# Altium PCB PCB1.PcbDoc (part 2 of 2)
Units mil, origin at the board's own origin, x right, y up, seen from the top; angles counter-clockwise.
Board outline 2700 x 1000 mil, 4 copper layers (LaYeR_1, LaYeR_2, LaYeR_3, LaYeR_4), stack 61.583 mil thick; 55 components, 67 nets, 281 pads, 143 vias.
Unrouted connection lines stored in the file: 1.
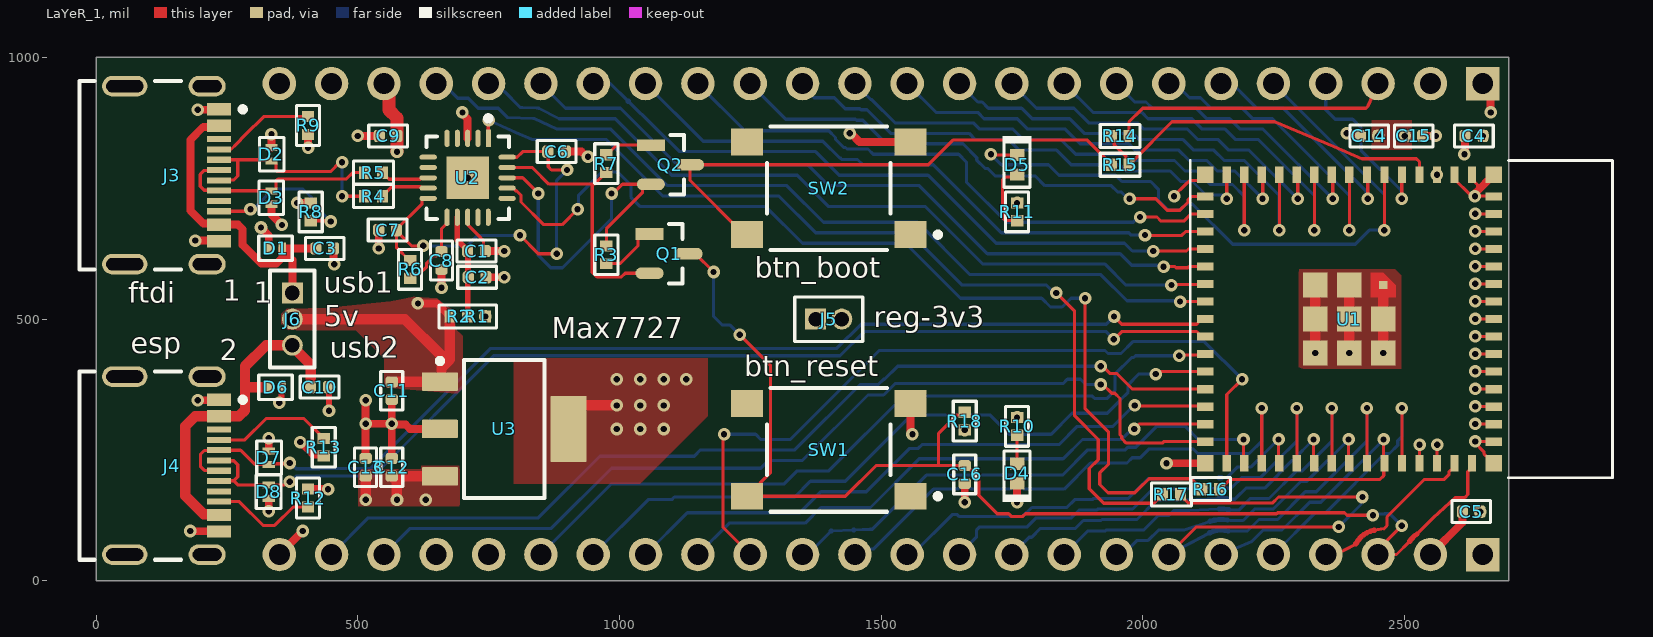
[diagram p0: LaYeR_1 view]

## Via types
v1: diameter 24, hole 12, LaYeR_1 to LaYeR_4, tented both sides, 143 vias

## Nets (pads, with @x,y where several pads share a name; then routed paths per layer and width w, separated by ;. In a path a pad name is that pad's centre, name@x,y a point inside that pad or via, vN(x,y) a via of type N, cw(c..) or ccw(c..) an arc to the next point about the centre after c; other vN are vias at no path point) (continued)
btn_gpio0: Q2.3 R15.1 SW2.2 | length 1026
  LaYeR_1 w6: SW2.2 1238.58,661.42 1135,765 Q2.3 1590.23,795 1637.23,842 1894.18,842 1940,796.18 R15.1
chip_pu: C16.2 J2.3 Q1.3 R18.1 SW1.2 U1.45 | length 2397.3
  LaYeR_1 w6: Q1.3 1145,625 v1(1180,590) ; v1(1230,470) 1289.02,410.98 1289.02,206.93 1269.02,186.93 1269.02,182.01 SW1.2@1248.43,161.42 ; SW1.2 SW1.2@1248.43,161.42 ; R18.1 1654.37,316.38 1644.73,316.38 1610,281.65 1610,220 ; v1(2440,125) 2390.62,125 2385.76,129.86 2257.87,129.86 2256.01,128 1776.18,128 1771.18,123 1748.82,123 1743.82,128 1722,128 1686.81,163.19 1686.81,199.68 1674.72,211.77 1669.75,211.77 1661.52,220 1610,220 ; v1(2495,105) 2450,60 J2.3 2485,50 2510.55,75.55 ; 2524.45,89.45 2555.39,120.39 2597.51,158.83 2615.34,158.83 2621.2,164.69 2621.2,208.44 2629.29,216.54 U1.45 ; SW1.2@1248.43,161.42 1431.84,161.42 1490.42,220 1610,220
  LaYeR_1 w10: 2510.55,75.55 cw(c2550,50) 2524.45,89.45
  LaYeR_4 w6: v1(1180,590) 1180,505 1196.16,488.84 1210.66,488.84 1229.5,470 v1(1230,470) ; v1(2440,125) 2442.68,127.68 2461.68,127.68 2462,128 2472,128 v1(2495,105)
con1_usb_n: D2.2 J3.A7 J3.B7 R4.1 | length 423.4
  LaYeR_1 w6.23: J3.A7 235.51,765.82 262.91,765.82 270.6,773.5 270.6,802.65 268.72,804.53 ; J3.B7@249.21,803.86 249.87,804.53 268.72,804.53 ; D2.2 339.92,802.2 343.7,798.43 343.7,785.64 347.35,781.99 447.83,781.99 465.84,800 v1(470,800) ; D2.2@335,804.53 268.72,804.53 ; v1(470,735) R4.1
  LaYeR_4 w6.23: v1(470,735) v1(470,800)
con1_usb_p: D3.2 J3.A6 J3.B6 R5.1 | length 402.9
  LaYeR_1 w6.23: J3.A6 234.18,784.18 206.77,784.18 199.09,776.5 199.09,753.82 206.77,746.14 234.18,746.14 J3.B6 235.08,745.24 334.76,745.24 D3.2 339.92,745 343.7,748.77 343.7,764.11 347.35,767.76 477.76,767.76 490,780 R5.1
con2_usb_n: D7.2 J4.A7 J4.B7 U1.23 | length 2133.9
  LaYeR_1 w6.12: J4.A7 234.12,210.88 206.8,210.88 199.14,218.53 199.14,241.16 206.8,248.81 234.12,248.81 J4.B7 276.09,249.53 303.41,222.2 D7.2 331.4,223.6 368.6,223.6 v1(370,225) ; v1(1945.33,505) 1960,490.33 2103.18,490.33 2106.76,493.91 2106.76,495.19 2111.57,500 U1.23
  LaYeR_4 w6.12: v1(370,225) 371.66,225 382.53,214.14 426.96,214.14 427,214.18 524.21,214.18 754.03,444 1415.75,444 1461.92,490.16 1930.33,490.16 1945.16,505 v1(1945.33,505)
con2_usb_p: D8.2 J4.A6 J4.B6 U1.24 | length 2099.2
  LaYeR_1 w6.12: J4.B6 235.56,191.19 262.89,191.19 ; J4.A6 235.56,229.12 262.89,229.12 270.54,221.47 270.54,198.84 262.89,191.19 ; v1(370,189.15) 365.16,189.15 358.81,182.8 D8.2 271.29,182.8 262.89,191.19 ; v1(1945,461.21) 1959.67,475.88 ; 1960,476.21 2103.18,476.21 2106.76,472.62 2106.76,471.35 2111.57,466.54 U1.24
  LaYeR_4 w6.12: v1(370,189.15) 371.66,189.15 382.53,200.02 432.8,200.02 432.85,200.06 530.06,200.06 759.88,429.88 1421.6,429.88 1467.77,476.04 1930.33,476.04 1945,461.37 v1(1945,461.21)
con_gpio0: J1.3 R14.1 | length 543.2
  LaYeR_1 w6: R14.1 1974.02,876.81 1997.28,900.07 2000.2,903 2426.73,903 2430.97,907.24 J1.3
dtr_ftdi: Q2.2 R3.1 U2.18 | length 646.1
  LaYeR_1 w6: U2.18 815,770 v1@840,745 ; R3.1 975,672.44 1043.86,741.3 1043.86,751.81 1049.64,757.6 Q2.2 ; v1(985,740) 987.99,740 1005.59,757.6 Q2.2@1044.7,757.6
  LaYeR_4 w6: v1(845,740) 845,621.82 868.82,598 891.18,598 985,691.82 v1(985,740)
ftdi_usb_n: R4.2 U2.9 | length 96.9
  LaYeR_1 w6.23: R4.2 547.01,736.18 554.52,743.7 555.7,743.7 565.05,753.04 619.21,753.04 621.93,750.32 U2.9
ftdi_usb_p: R5.2 U2.8 | length 94.7
  LaYeR_1 w6.23: R5.2 547.01,778.82 554.52,771.3 555.7,771.3 559.74,767.27 619.21,767.27 621.93,770 U2.8
GND: C1.1 C2.1 C3.1 C4.1 C5.1 C6.1 C7.1 C8.1 C9.1 C10.1 C11.1 C12.1 C13.1 C14.1 C15.1 C16.1 D1.1 D2.1 D3.1 D4.1 D6.1 D7.1 D8.1 J1.1 J1.23 J2.2 J2.24 J3.A1B12 J3.B1A12 J3.S1 J3.S2 J3.S3 J3.S4 J4.A1B12 J4.B1A12 J4.S1 J4.S2 J4.S3 J4.S4 R8.1 R9.1 R12.1 R13.1 SW1.3 SW2.3 U1.1 U1.2 U1.42 U1.43 U1.46 U1.47 U1.48 U1.49 U1.50 U1.51 U1.52 U1.53 U1.54 U1.55 U1.56 U1.57 U1.58 U1.59 U1.60 U1.61 U1.62 U1.63 U1.64 U1.65 U1.66 U1.67 U1.68 U1.69 U1.70 U1.71 U1.72 U1.73 U2.3 U2.13 U2.21 U3.2 U3.4 | length 3286.2
  LaYeR_1 w6: U2.13 710,680 730,660 740,650 C1.1@740,638.64 ; v1(2060,735) 2060,735.54 2082.09,757.63 2082.63,757.63 2089.84,764.84 2108.7,764.84 U1.63 ; U1.42@2529.27,224.78 v1(2529.27,259.67) ; U1.43@2562.74,224.78 v1(2562.74,259.67) ; U1.2 2595.83,767.72 2625.86,737.68 2632.32,737.68 v1(2635,735) 2669.88,735 U1.60 ; U1.1 2629.29,767.72 2640,757.01 2640,750 ; v1(2635.37,299.59) U1.47@2670.26,299.59 ; v1(2635.37,333.05) U1.48@2670.26,333.05 ; v1(2635.37,366.52) U1.49@2670.26,366.52 ; v1(2635.37,399.98) U1.50@2670.26,399.98 ; v1(2635.37,433.44) U1.51@2670.26,433.44 ; v1(2635.37,466.91) U1.52@2670.26,466.91 ; v1(2635.37,500.37) U1.53@2670.26,500.37 ; v1(2635.37,533.84) U1.54@2670.26,533.84 ; v1(2635.37,567.3) U1.55@2670.26,567.3 ; v1(2635.37,600.77) U1.56@2670.26,600.77 ; v1(2635.37,634.23) U1.57@2670.26,634.23 ; v1(2635.37,667.7) U1.58@2670.26,667.7 ; v1(2635.37,701.16) U1.59@2670.26,701.16 ; U1.46@2670.26,266.12 v1(2635.37,266.12) 2635.37,263.16 2652.17,246.37 2652.17,242.87 U1.65
  LaYeR_1 w11: v1(350,340) 350,343.52 354.2,347.72 354.2,368.61 D6.1 ; v1(445,325) C10.1@445,364.41
  LaYeR_1 w15: v1(180,95) 180.49,94.51 234.35,94.51 J4.B1A12 ; v1(189.39,650) J3.B1A12@215,650 ; v1(194.39,345) J4.A1B12@220,345 ; v1(194.39,900) J3.A1B12@220,900 ; v1(315,675) 330,660 D1.1 ; v1(330,132.8) D8.1 ; D7.1 v1(330,272.2) ; D3.1 335,700 v1(355,680) ; D2.1 v1(335,853.4) ; J2.24 v1(395,95) ; v1(384.39,722.01) R8.1 ; v1(390,265) 391.03,265 414.91,241.12 431.87,241.12 R13.1 ; R12.1@403.82,175 R12.1 v1(443.23,175) ; v1(405,827.38) R9.1 ; C10.1@443.86,368.82 C10.1 ; C3.1 453.86,606.14 v1(455,605) ; v1@510,850 C9.1 ; C13.1 v1(515,300) ; v1(515,345) v1(515,300) ; v1(540,635) C7.1 ; C12.1 v1(565,300) ; C11.1 v1(565,300) ; U3.2 600,290 591.72,298.28 566.72,298.28 v1(565,300) ; v1@660,570 C8.1 ; v1(700,895) 700,892.56 710,882.56 U2.3 ; C1.1 v1(780,630) ; C2.1 v1(780,580) ; C6.1 927.56,820 937.56,810 v1(940,810) ; U3.4 903.03,308.05 U3.4@929.98,335 ; v1(1440,855) 1442.44,855 1458.85,838.58 SW2.3 ; SW1.3 1556.5,283.5 v1(1560,280) ; v1(1660,150) C16.1 ; v1(1760,150) D4.1 ; v1(2045.59,224.41) U1.64 ; v1(2390,855) 2391.72,853.28 2413.01,853.28 2416.14,850.15 C14.1 ; C15.1 v1(2560,850) ; J2.2 2611.05,111.05 C5.1 ; v1(2615,815) 2616.14,816.14 C4.1 ; v1(2635,735) 2636.72,736.72 2636.72,741.68 U1.62 ; J1.1 2665,935 v1(2665,895) ; v1(515,300) v1(565,300)
  LaYeR_1 w20: U3.4@929.98,335 v1(995,335) ; v1(2330.08,435.04) U1.72 U1.71 ; v1(2395.04,435.04) U1.61 U1.69 ; v1(2460,435.04) U1.67 U1.66
  other v1: 995,290 1040,290 1085,290 1040,335 1085,335 995,385 1040,385 1085,385 1128,385 660,560 710,770 500,850
gpio0: R14.2 R15.2 U1.4 | length 699.2
  LaYeR_1 w6: R14.2 1945.63,844.37 1945.63,833.02 1968.39,810.27 1968.39,800.63 R15.2 ; R15.2@1974.02,796.18 1979.65,801.81 1980.83,801.81 2056.16,877.14 2249.87,877.14 2251.87,877.14 2253.72,876.37 2365,830 2419.64,806.34 2523.09,806.34 2528.95,800.48 2528.95,775.65 U1.4
gpio1: J1.4 U1.5 | length 345.3
  LaYeR_1 w6: v1(2495,730) 2495.22,730.22 2495.22,775.37 U1.5
  LaYeR_4 w6: J1.4 2350,900 2368,882 2401.18,882 2417,866.18 2417,823 2493.41,746.59 2493.41,731.59 v1(2495,730)
gpio2: D5.1 J1.5 U1.6 | length 1380.8
  LaYeR_1 w6: v1(1710,815) 1711.3,813.7 D5.1 ; v1(2461.93,670) 2461.97,670.04 U1.6
  LaYeR_4 w6: v1(1710,815) 1730,795 1820,795 1840,775 1948.38,775 1960.38,763 1984.72,763 2015.28,763 2030,748.28 2030,726.82 2048.82,708 2071.18,708 2083.18,720 2095,720 2172,643 2406.18,643 2433.18,670 v1(2461.93,670) 2461.93,738.07 J1.5
gpio3: J1.6 U1.7 | length 423.5
  LaYeR_1 w6: v1(2430,730) 2430.22,730.22 U1.7@2430.22,775.37
  LaYeR_4 w6: J1.6 2160.33,939.67 2181.69,939.67 2192.27,929.08 2218.36,903 2268.72,903 2427.32,744.39 2427.32,732.68 v1(2430,730)
gpio4: J1.7 U1.8 | length 605.4
  LaYeR_1 w6: v1(2395,670) v1(2395,670) U1.8
  LaYeR_4 w6: J1.7 2062.47,950 2089.47,923 2110.53,923 2130.53,903 2190.07,903 2210.07,883 2248.25,883 2395,736.25 v1(2395,670)
gpio5: J1.8 U1.9 | length 549.7
  LaYeR_1 w6: v1(2363.07,730) 2363.29,730.22 U1.9@2363.29,775.37
  LaYeR_4 w6: J1.8 1985,915 2006.37,915 2018.37,903 2102.25,903 2122.25,883 2166.16,883 2186.16,863 2230.07,863 v1(2363.07,730)
gpio6: J1.9 U1.10 | length 738.5
  LaYeR_1 w6: v1(2328.07,670) v1(2328.07,670) U1.10
  LaYeR_4 w6: J1.9 1905,895 1998.09,895 2010.09,883 2093.96,883 2113.96,863 2157.64,863 2177.64,843 2221.33,843 2328.07,736.25 v1(2328.07,670)
gpio7: J1.10 U1.11 | length 682.7
  LaYeR_1 w6: v1(2296.14,730) 2296.36,730.22 U1.11@2296.36,775.37
  LaYeR_4 w6: J1.10 1797,903 1868.72,903 1896.72,875 1989.81,875 2001.81,863 2085.68,863 2105.68,843 2144.41,843 2164.41,823 2203.14,823 v1(2296.14,730)
gpio8: J1.11 U1.12 | length 871.5
  LaYeR_1 w6: v1(2261.14,670) 2261.18,670.04 U1.12
  LaYeR_4 w6: J1.11 1685,915 1693.14,915 1705.14,903 1768.72,903 1788.72,883 1860.43,883 1888.43,855 1981.52,855 1993.52,843 2077.4,843 2097.4,823 2135.9,823 2155.9,803 2194.4,803 2261.14,736.25 v1(2261.14,670)
gpio9: J1.12 U1.13 | length 815.8
  LaYeR_1 w6: v1(2229.21,730) 2229.43,730.22 U1.13@2229.43,775.37
  LaYeR_4 w6: J1.12 1605,895 1684.85,895 1696.85,883 1760.43,883 1780.43,863 1852.15,863 1880.15,835 1973.24,835 1985.24,823 2069.11,823 2089.11,803 2122.66,803 2142.66,783 2176.21,783 v1(2229.21,730)
gpio10: J1.13 U1.14 | length 1003.7
  LaYeR_1 w6: v1(2194.21,670) 2194.25,670.04 U1.14
  LaYeR_4 w6: J1.13 1480,920 1481.57,920 1526.57,875 1676.57,875 1688.57,863 1752.15,863 1772.15,843 1843.86,843 1871.86,815 1964.95,815 1976.95,803 2060.83,803 2080.83,783 2103.43,783 2129.22,757.22 2171.75,757.22 2194.21,734.76 v1(2194.21,670)
gpio11: J1.14 U1.15 | length 950
  LaYeR_1 w6: v1(2160.57,730.22) 2160.79,730.43 U1.15
  LaYeR_4 w6: J1.14 1350,945 1372,923 1410.53,923 1431.53,902 1459.47,902 1461.47,900 1473.28,900 1518.28,855 1668.28,855 1680.28,843 1743.86,843 1763.86,823 1835.58,823 1863.58,795 1956.67,795 1968.67,783 2052.54,783 2072.54,763 2095.15,763 2120.93,737.22 2153.57,737.22 v1(2160.57,730.22)
gpio12: J1.15 U1.16 | length 986
  LaYeR_1 w6: v1(1975,730) 2025,730 2047,708 2071.18,708 2087,723.82 2087,728.39 2092.86,734.25 U1.16
  LaYeR_4 w6: J1.15 1318,882 1451.18,882 1453.18,880 1465,880 1510,835 1628.28,835 1656.57,835 1683,808.57 1683,803.82 1698.82,788 1703.57,788 1718.16,773.41 1794.78,773.41 1813.18,755 1940.1,755 1952.1,743 1959.14,743 1972.14,730 v1(1975,730)
gpio13: J1.16 U1.17 | length 1116.4
  LaYeR_1 w6: v1(1995,695) 2027.45,695 2035.13,687.32 2078.79,687.32 2092.26,700.79 U1.17
  LaYeR_4 w6: J1.16 1240,860 1400,860 1413,847 1413,843.82 1428.82,828 1432,828 1435,825 1475,825 1485,815 1648.28,815 1663,800.28 1663,762 1740,685 1982.14,685 1992.14,695 v1(1995,695)
gpio14: J1.17 U1.18 | length 1192.6
  LaYeR_1 w6: v1(2004.47,660.53) 2005,660 2075,660 2082.32,667.32 U1.18
  LaYeR_4 w6: J1.17 1160,840 1388.53,840 1420.53,808 1422,808 1425,805 1455,805 1465,795 1600,795 1730,665 1973.53,665 1978,660.53 v1(2004.47,660.53)
gpio15: J1.18 U1.19 | length 1303
  LaYeR_1 w6: v1(2020,630) 2083.79,630 2087.65,633.86 U1.19
  LaYeR_4 w6: J1.18 983.07,950 1017,916.54 ; 1017.02,916.52 1115,820 1119.14,820 1375,820 1420,775 1590,775 1720,645 1965.25,645 1980.25,630 v1(2020,630)
gpio16: J1.19 U1.20 | length 1416.4
  LaYeR_1 w6: v1(2040,600) 2040.2,600.2 2061.62,600.2 2063.82,598 2086.18,598 2088.38,600.2 2119.25,600.2 U1.20
  LaYeR_4 w6: J1.19 897,903 1002,903 1110,795 1360,795 1400,755 1573.28,755 1703.28,625 1956.96,625 1978.96,603 2027.14,603 2027.46,602.68 2037.32,602.68 v1(2040,600)
gpio17: J1.20 U1.21 | length 1525.6
  LaYeR_1 w6: v1(2055,565) 2055.96,565.96 2118.48,565.96 U1.21
  LaYeR_4 w6: J1.20 764.61,950 780.35,934.27 780.73,934.27 807.76,907.24 810.55,904.45 814.48,904.32 841.62,903.36 845.95,902.85 884.9,883 887.14,883 992,883 994.93,880.07 1100,775 1340,775 1400,715 1585,715 1695,605 1928.28,605 1968.28,565 v1(2055,565)
gpio18: J1.21 U1.22 | length 1637.4
  LaYeR_1 w6: v1(2071.54,533.46) U1.22
  LaYeR_4 w6: J1.21 662.9,950 690.9,922 711.18,922 730.18,903 768.72,903 786.72,885 835,883.5 ; 835.03,883.5 837.15,883.36 880.43,863 983.72,863 1091.72,755 1320,755 1390,685 1570,685 1670,585 1920,585 1970,535 2070,535 v1(2071.54,533.46)
gpio21: J2.19 U1.25 | length 1450.3
  LaYeR_1 w6: v1(2070,430) 2071.54,431.54 2117.91,431.54 U1.25
  LaYeR_4 w6: J2.19 985,185 1315,185 1340,210 1400,210 1542.87,352.87 1903.95,352.87 1908.82,348 1931.53,348 1947,363.47 1947,394.4 1979.21,426.61 1982.82,426.61 1986.21,430 v1(2070,430)
gpio26: J2.18 U1.26 | length 1353.8
  LaYeR_1 w6: v1(2025,395) 2028.79,395 2033.59,399.8 2119.25,399.8 U1.26
  LaYeR_4 w6: J2.18 1055,155 1100,155 1105,160 1335,160 1365,190 1431.82,190 1558.82,317 1708,317 1745,280 1825,280 1865,320 1932.55,320 1957.13,344.58 1957.13,345.32 1972.23,360.41 1972.23,374.59 1992.64,395 v1(2025,395)
gpio33: J2.17 U1.28 | length 1188.5
  LaYeR_1 w6: v1(1985,335) 1986.16,333.84 2118.29,333.84 U1.28
  LaYeR_4 w6: J2.17 1130,130 1345,130 1385,170 1472,170 1555,253 1571.18,253 1578.18,260 1840,260 1875,295 1943.39,295 1983.39,335 v1(1985,335)
gpio34: J2.16 U1.29 | length 1072.7
  LaYeR_1 w6: v1(1983.79,290) 1993,299.21 U1.29
  LaYeR_4 w6: J2.16 1210,110 1355,110 1385,140 1480,140 1573,233 1848,233 1885,270 1958.43,270 1963.43,275 1965,275 1980,290 v1(1983.79,290)
gpio35: J2.15 U1.31 | length 1531.3
  LaYeR_1 w6: v1(1200,280) 1197.99,277.99 1197.99,102.01 J2.15 ; U1.31 2160.79,355.79 v1(2190,385)
  LaYeR_4 w6: v1(1200,280) 1260.25,280 1270.25,270 1326.72,270 1496.72,440 1928.02,440 1933.82,434.21 1958.53,434.21 1981.32,457 2118,457 v1(2190,385)
gpio36: J2.14 U1.32 | length 998.7
  LaYeR_1 w6: U1.32@2192.54,224.63 2192.54,269.78 v1(2192.76,270)
  LaYeR_4 w6: J2.14 1360,50 1402.07,92.07 1405,95 ; 1405.03,95 1447.77,96.95 ; 1448.1,96.96 1479.49,98.23 1483.39,98.39 1486.15,101.15 1586.77,201.77 1846.77,201.77 1895,250 1966.72,250 1971.72,255 1986.97,255 2003.97,272 2026.97,295 2081.47,295 2106.47,270 v1(2192.76,270)
  LaYeR_4 w10: 1447.77,96.95 cw(c1450,50) 1448.1,96.96
gpio37: J2.13 U1.33 | length 1047.1
  LaYeR_1 w6: U1.33 2227.72,329.96 v1(2227.76,330)
  LaYeR_4 w6: J2.13 1460.33,60.33 1485.33,60.33 1600,175 1646.82,175 1648.82,177 1671.18,177 1673.18,175 1746.82,175 1748.82,177 1771.18,177 1773.18,175 1850,175 1900,225 1970,225 1980,235 1995.26,235 2012.26,252 2096.18,252 2105.18,243 2203.94,243 2227.76,266.82 v1(2227.76,330)
gpio38: J2.12 U1.34 | length 848.6
  LaYeR_1 w6: U1.34@2259.47,224.63 2259.47,269.78 v1(2259.69,270)
  LaYeR_4 w6: J2.12 1560,50 1636.77,126.77 1645.05,126.77 1648.82,123 1771.18,123 1788.18,140 1855.15,140 1870.15,155 1903.68,155 1905.68,157 1972.58,157 2010.58,195 2068.18,195 2076.47,195 2145.89,196.94 ; 2150,197 2160.83,197 2163.62,199.79 2180.83,217 2206.22,217 2259.22,270 v1(2259.69,270)
  LaYeR_4 w10: 2145.89,196.94 cw(c2150,50) 2150,197
gpio39: J2.11 U1.35 | length 911.4
  LaYeR_1 w6: U1.35 2294.65,329.96 v1(2294.69,330)
  LaYeR_4 w6: J2.11 1650,51.14 1682.67,83.8 1682.67,97.14 1688.52,103 1779.47,103 1796.47,120 1863.43,120 1878.43,135 1911.96,135 1913.96,137 1980.86,137 2018.86,175 2084.75,175 2146.3,176.95 ; 2156.6,176.83 2160.45,176.63 2168.74,176.63 2171.3,179.19 2189.11,197 2224.87,197 2277.87,250 2278.33,250 2294.69,266.36 v1(2294.69,330)
  LaYeR_4 w10: 2146.3,176.95 cw(c2150,50) 2156.6,176.83
gpio40: J2.10 U1.36 | length 712.7
  LaYeR_1 w6: U1.36@2326.4,224.63 2326.4,269.78 v1(2326.61,270)
  LaYeR_4 w6: J2.10 1783,83 1787.75,83 1804.75,100 1871.72,100 1886.72,115 1920.25,115 1922.25,117 1989.15,117 2026.27,154.13 2080.66,154.13 2145.42,156.9 ; 2160.79,156.45 2167.85,155.74 2176.13,155.74 2178.91,158.52 2197.4,177 2233.15,177 2286.15,230 2286.61,230 v1(2326.61,270)
  LaYeR_4 w10: 2145.42,156.9 cw(c2150,50) 2160.79,156.46
gpio41: J2.9 U1.37 | length 770.1
  LaYeR_1 w6: U1.37 v1(2361.61,330) v1(2361.61,330)
  LaYeR_4 w6: J2.9 1895,95 1928.53,95 1930.53,97 2002.25,97 2030.25,125 2050,125 2059.13,134.13 2088.95,134.13 2145.76,136.9 ; 2164.76,135.74 2175.4,135 2183.68,135 2187.2,138.52 2205.68,157 2241.44,157 2294.44,210 2305,210 2361.61,266.61 v1(2361.61,330)
  LaYeR_4 w10: 2145.76,136.9 cw(c2150,50) 2164.76,135.74
gpio42: J2.8 U1.38 | length 575.9
  LaYeR_1 w6: U1.38@2393.33,224.63 2393.33,269.78 v1(2393.54,270)
  LaYeR_4 w6: J2.8 1962.47,50 1989.47,77 2010.53,77 2030.53,97 2079.18,97 2128.79,113.56 ; 2162.3,115.86 2167.11,115 2191.96,115 2213.96,137 2249.72,137 2302.72,190 2313.54,190 v1(2393.54,270)
  LaYeR_4 w10: 2128.79,113.56 cw(c2150,50) 2162.3,115.86
gpio45: J2.5 U1.41 | length 504.1
  LaYeR_1 w6: U1.41 2495.43,329.96 v1(2495.47,330)
  LaYeR_4 w6: J2.5 2330,130 2350,130 2463,243 2471.66,243 2487.47,258.82 2487.47,267.47 2495.47,275.47 v1(2495.47,330)
gpio46: J2.4 U1.44 | length 332
  LaYeR_1 w6: J2.4 2359.98,46.95 2363.97,46.95 2406.1,69.39 2407.15,70.44 2408.2,71.49 ; 2442.46,96.39 2461.14,99.43 2467,105.28 2467,122 2538.66,193.66 2576.45,193.66 2585.24,202.45 2585.24,207.8 2591.09,213.66 2592.95,213.66 2595.83,216.54 U1.44
  LaYeR_1 w10: 2408.2,71.49 cw(c2450,50) 2442.46,96.39
gpio47: J2.23 U1.27 | length 1836.7
  LaYeR_1 w6: v1(1920,410) 1923.79,410 1938.01,395.78 1951.04,395.78 1980.67,366.14 U1.27
  LaYeR_4 w6: J2.23 520,120 845,120 963,238 1143,238 1155,250 1335,250 1460,375 1495,375 1505,385 1506.72,385 1531.72,410 v1(1920,410)
gpio48: J2.22 U1.30 | length 1802.8
  LaYeR_1 w6: v1(1920,375) 1923.79,375 1940.61,358.18 1946.82,358.18 1956.79,348.21 1956.79,278.82 1960,275.6 1960,271.82 1968.82,263 2037.38,263 2040.13,265.75 U1.30
  LaYeR_4 w6: J2.22 600,100 870,100 985,215 1270,215 1285,230 1350,230 1475,355 1505,355 1527,377 1848.21,377 1856.21,385 1881.21,385 1891.21,375 v1(1920,375)
NetC8_2: C8.2 R6.1 U2.11 | length 155.3
  LaYeR_1 w6: R6.1 605.63,583.62 609.91,583.62 612.67,586.38 618.02,586.38 631.62,599.97 631.62,606.97 645.28,620.63 650.25,620.63 658.48,628.86 C8.2 660,672.65 670.63,683.28 U2.11
NetD4_2: D4.2 R10.1 | length 54.3
  LaYeR_1 w6: D4.2 R10.1
NetD5_2: D5.2 R11.1 | length 134.5
  LaYeR_1 w6: R11.1@1760,688.22 1737.87,688.22 1732.01,694.08 1732.01,765.77 1737.87,771.63 1755.33,771.63 D5.2
NetJ3_A5: J3.A5 R9.2 | length 196.5
  LaYeR_1 w6: J3.A5 235.75,825.12 258.75,825.12 267.48,833.85 267.48,834.48 285,852 320.01,887.01 R9.2
NetJ3_B5: J3.B5 R8.2 | length 291.3
  LaYeR_1 w6: J3.B5 287.04,706.1 290.94,710 v1(295,710) ; R8.2 447.01,687.99 v1@450,685
  LaYeR_4 w6: v1@305,715 338.51,748.51 395.37,748.51 420.5,723.37 420.5,714.5 v1(448.5,686.5)
NetJ4_A5: J4.A5 R13.2 | length 232.8
  LaYeR_1 w6: J4.A5 284.21,269.21 325,310 397.01,310 R13.2
NetJ4_B5: J4.B5 R12.2 | length 203.5
  LaYeR_1 w6: J4.B5 273.51,151.1 318.82,105.8 341.18,105.8 376.37,140.98 R12.2
NetQ1_1: Q1.1 R3.2 | length 115
  LaYeR_1 w6: R3.2 1001.16,605.98 1035.86,640.69 1035.86,656.14 1042.12,662.4 Q1.1
NetQ2_1: Q2.1 R7.2 | length 92.8
  LaYeR_1 w6: R7.2 976.18,814.02 994.57,832.4 Q2.1
rts_ftdi: Q1.2 R7.1 U2.19 | length 493.1
  LaYeR_1 w6: U2.19 833.5,789.68 835,788.18 865.18,758 948.19,758 951.82,758 973.82,780 R7.1 ; 948.19,754.37 948.19,589.14 956.98,580.35 1003.81,580.35 1011.06,587.6 Q1.2
rxd_ftdi: R17.1 U2.1 | length 1822.8
  LaYeR_1 w6: U2.1 749.37,879.37 v1(750,880) ; v1(1835,550) 1870,515 1870,315 1915,270 1915,231.47 1898,214.47 1898,175.53 1925.53,148 2020.99,148 2031.18,158.19 2032.36,158.19 2037.99,163.82 R17.1
  LaYeR_4 w6: v1(750,880) 800.09,857.33 801.89,856.63 833.55,843 835,843 975.43,843 1083.43,735 1305,735 1375,665 1555,665 1655,565 1816.21,565 1831.21,550 v1(1835,550)
txd_ftdi: R16.1 U2.17 | length 1927.9
  LaYeR_1 w6: U2.17 796.72,750.32 801.63,745.4 803.29,745.4 811.94,736.75 811.94,723.79 855.1,680.62 890.62,680.62 v1(920,710) ; v1(1890,540) 1890,328.78 1935,283.78 1935,223.18 1918,206.18 1918,183.82 1933.82,168 1956.18,168 1984.82,168 1992.35,175.53 1992.69,175.53 2012.15,195 2092.99,195 2106.18,181.81 2107.36,181.81 2112.99,176.18 R16.1
  LaYeR_4 w6: v1(920,710) 922,712 922,737 965.86,780.86 997.33,780.86 1022,756.18 1022,733 1040,715 1280,715 1350,645 1546.72,645 1651.9,539.82 1807,539.82 1823.82,523 1846.18,523 1863,539.82 v1@1889.82,539.82
u0rxd: J2.6 R16.2 U1.40 | length 792.6
  LaYeR_1 w6: R16.2 2147.01,176.18 2152.64,181.81 2155.31,181.81 2167.16,193.66 2453.49,193.66 2460.68,200.86 2460.68,223.13 U1.40 ; J2.6@2148.86,51.14 J2.6 ; U1.40@2460.26,224.63 2460.26,269.78 v1(2460.47,270)
  LaYeR_4 w6: J2.6 2208.53,75 2230.53,97 2266.29,97 2319.29,150 2340.47,150 v1(2460.47,270)
u0txd: J2.7 R17.2 U1.39 | length 1412.9
  LaYeR_1 w6: J2.7 2102.86,102.86 v1(2374.57,102.86) ; R17.2 2072.01,163.82 2087.64,148.19 2247.91,148.19 2259.72,160 v1(2420,160) ; U1.39 v1(2428.54,330) v1(2428.54,330)
  LaYeR_4 w6: J2.7 2127.91,91.49 ; 2163.56,95 2200.25,95 2222.25,117 2258.01,117 2311.01,170 2331.73,170 2428.54,266.82 v1(2428.54,330) ; v1(2374.57,102.86) 2417.32,145.61 2417.32,157.32 v1(2420,160)
  LaYeR_4 w10: 2127.91,91.49 cw(c2150,50) 2163.56,95
vcc_ftdi: C1.2 C2.2 R1.1 R2.1 U2.12 | length 198.4
  LaYeR_1 w11: U2.12 690.31,650.79 710,631.11 C1.2 710.57,629.43 C2.2@710.57,580 ; R1.1 710,578.86 C2.2
pads on no net: J1.24 J2.20 J2.21 J3.A8 J3.B8 J4.A8 J4.B8 SW1.1 SW1.4 SW2.1 SW2.4 U2.2 U2.4 U2.5 U2.6 U2.7 U2.14 U2.15 U2.16

## Polygon pours and split planes (outlines as drawn)
GND on LaYeR_1 "GND_L01_P007" (solid, pour order 7): 798,185 867.4,185 1039.4,185 1168.4,314 1168.4,387 1168.4,425 798,425
GND on LaYeR_1 "GND_L01_P006" (solid, pour order 6): 2295.58,598.41 2298.99,595 2483,595 2494,584 2494,405 2299,405 2297,407 2298,408 2298,595
5v on LaYeR_1 "5V_L01_P005" (solid, pour order 5): 372.19,521.03 365.03,521.03 354,510 354,490 356,490 367,479 496,479 551,424 551,373 555,369 690,357 702,369 701,370 701,468 686,482 686,516 670,525 652,540 608.69,542.93 606,542.93 583,538 563,534 433,521.03 418,521 373,521
3v3_reg on LaYeR_1 "3V3_REG_L01_P004" (solid, pour order 4): 694.25,219.29 693.53,220 621,220 621,215 619,213 506,213 500,207 501,206 501,142 694,142 694,144 695,145 695,220
3v3 on LaYeR_1 "3V3_L01_P000" (solid, pour order 0): 2438,880 2438,824 2514,824 2514,880
GND on LaYeR_2 "GND_L02_P010" (solid, pour order 10): 2682.18,983 2682,982.82 2682,18 11,18 11,982.82
3v3_reg on LaYeR_2 "3V3_REG_L02_P009" (solid, pour order 9): 481,200.04 477,196.05 477,114 514.67,91.12 642,114 723.08,128.57 816,133 919,142 925,173 872,169 728.66,178 526,209 481.45,200.06
3v3 on LaYeR_2 "3V3_L02_P008" (solid, pour order 8): 2682,983 2682,18 2610,18 2593.47,187.41 2542.69,249.58 2545.98,674 2465.24,683.69 2429.67,775.83 1894.13,771.47 1808.85,680 1822,272 1669,241 1246,680 1103,680 1103,674 915,486 719,486 719,979 702,996
GND on LaYeR_3 (split plane): 2699.95,0.05 0.05,0.05 0.05,999.95 2699.95,999.95

## Silkscreen, mask and mechanical layers (free items; w line width, h text height)
Top Overlay:
  text "btn_boot" at 1259,578.66 h40
  text "usb1" at 435,550 h40
  text "1" at 242,535 h40
  text "ftdi" at 61,531 h40
  text "5v" at 436,486 h40
  text "reg-3v3" at 1486,484.33 h40
  text "Max7727" at 871,463 h40
  text "esp" at 66,434.33 h40
  text "usb2" at 446,426 h40
  text "2" at 236,421 h40
  text "btn_reset" at 1239,390.66 h40
Bottom Overlay:
  text "-" at 382,881.01 h40 r90
  text "GND" at 474,874 h40 r90
  text "5v" at 574,874 h40 r90
  text "GPIO18" at 674,874 h40 r90
  text "GPIO17" at 774,874 h40 r90
  text "GPIO16" at 874,874 h40 r90
  text "GPIO15" at 974,874 h40 r90
  text "GPIO14" at 1074,874 h40 r90
  text "GPIO13" at 1174,874 h40 r90
  text "GPIO12" at 1274,874 h40 r90
  text "GPIO11" at 1374,874 h40 r90
  text "GPIO10" at 1474,874 h40 r90
  text "GPIO9" at 1574,874 h40 r90
  text "GPIO8" at 1674,874 h40 r90
  text "GPIO6" at 1854,874 h40 r90
  text "GPIO4" at 2074,874 h40 r90
  text "GPIO2" at 2274,874 h40 r90
  text "GPIO1" at 2374,874 h40 r90
  text "GND" at 2474,874 h40 r90
  text "3v3" at 2569,874 h40 r90
  text "GND" at 2674,874 h40 r90
  text "GPIO3" at 2166.02,871.14 h40 r90
  text "GPIO5" at 1968.02,869 h40 r90
  text "GPIO7" at 1764.43,867 h40 r90
  text "github.com/Max7727" at 1903,563.99 h60
  text "Ver.1" at 2428,532 h60
  text "GPIO33" at 1031.98,131 h40 r270
  text "GPIO21" at 833.98,128.86 h40 r270
  text "GND" at 326,126 h40 r270
  text "GPIO47" at 431,126 h40 r270
  text "GPIO48" at 526,126 h40 r270
  text "-" at 606.01,126 h40 r270
  text "-" at 706.01,126 h40 r270
  text "GPIO26" at 926,126 h40 r270
  text "GPIO34" at 1126,126 h40 r270
  text "GPIO35" at 1226,126 h40 r270
  text "GPIO36" at 1326,126 h40 r270
  text "GPIO37" at 1426,126 h40 r270
  text "GPIO38" at 1526,126 h40 r270
  text "GPIO39" at 1626,126 h40 r270
  text "GPIO40" at 1726,126 h40 r270
  text "GPIO41" at 1826,126 h40 r270
  text "GPIO42" at 1926,126 h40 r270
  text "tx" at 2026,126 h40 r270
  text "rx" at 2126,126 h40 r270
  text "GPIO45" at 2226,126 h40 r270
  text "GPIO46" at 2326,126 h40 r270
  text "enbl" at 2426,126 h40 r270
  text "GND" at 2526,126 h40 r270
  text "3v3" at 2638,118.99 h40 r270
Board Shape LaYeR:
  the board outline again, w13

## Text inside footprints (layer, text, board x,y; h text height)
J1: Bottom Overlay "1" at 3194,847 h40 r270
J2: Bottom Overlay "1" at 3258,910 h40 r270
J5: Top Overlay "1" at 3227,884 h40 r90
J6: Top Overlay "1" at 301,531 h40